# EAGLE board driver_board (EAGLE 7.5.0)
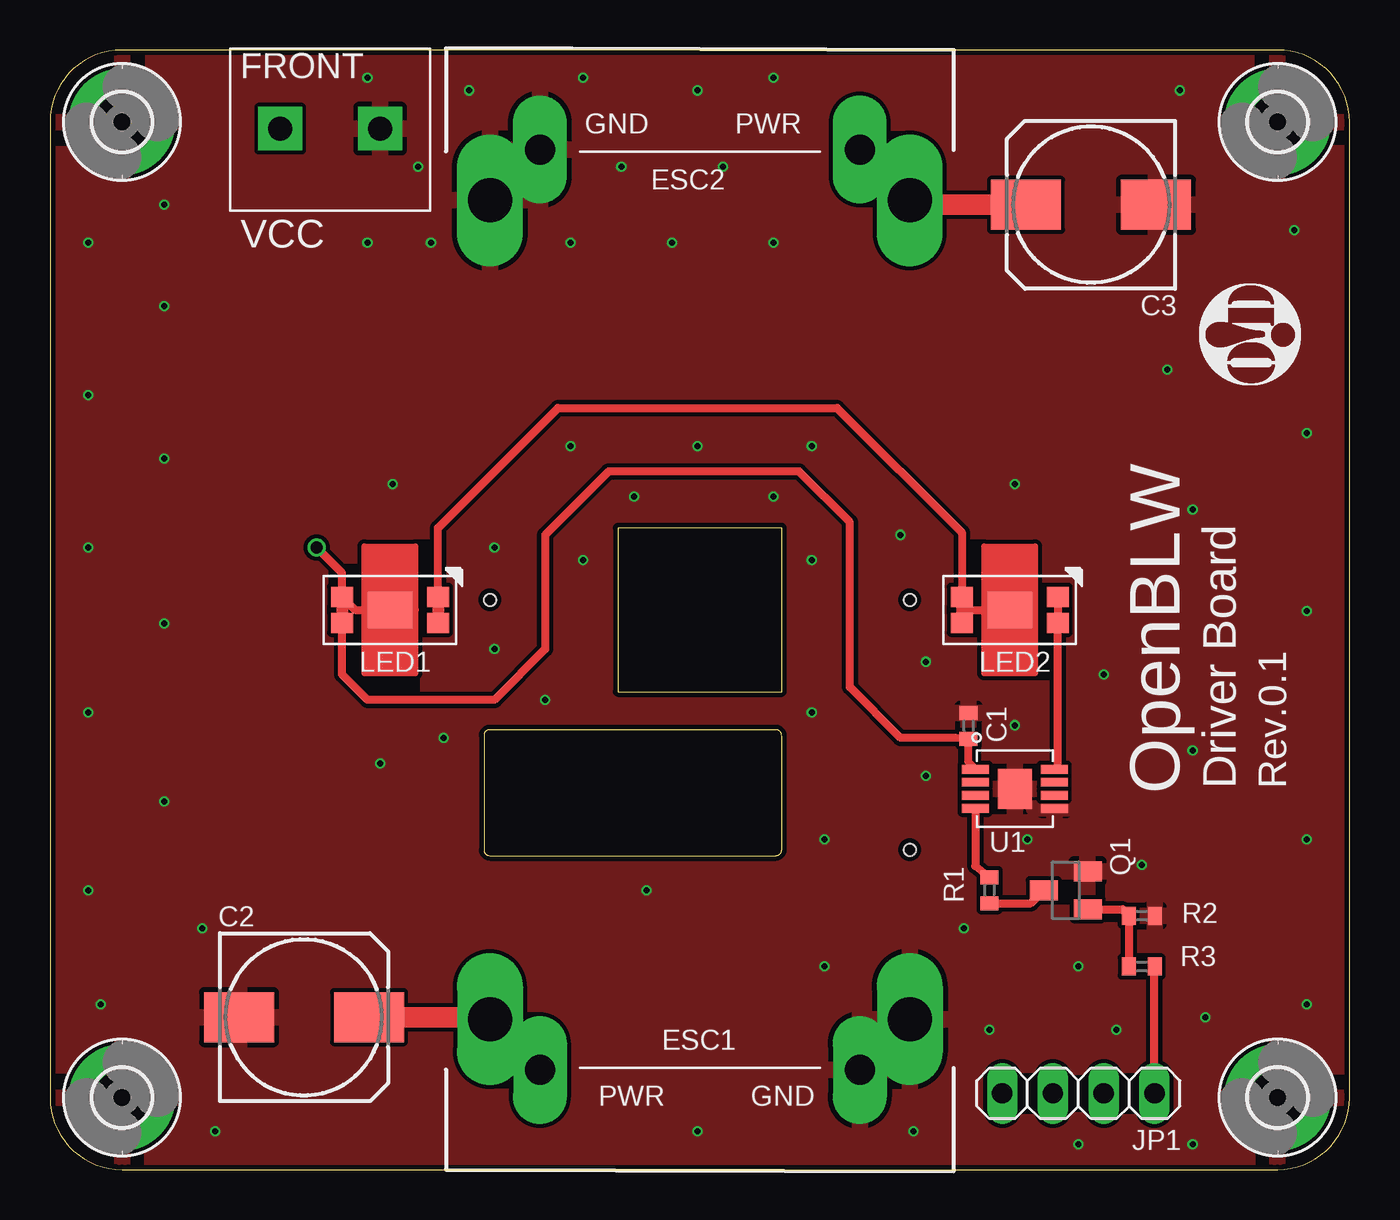
[diagram p0: board, top side]
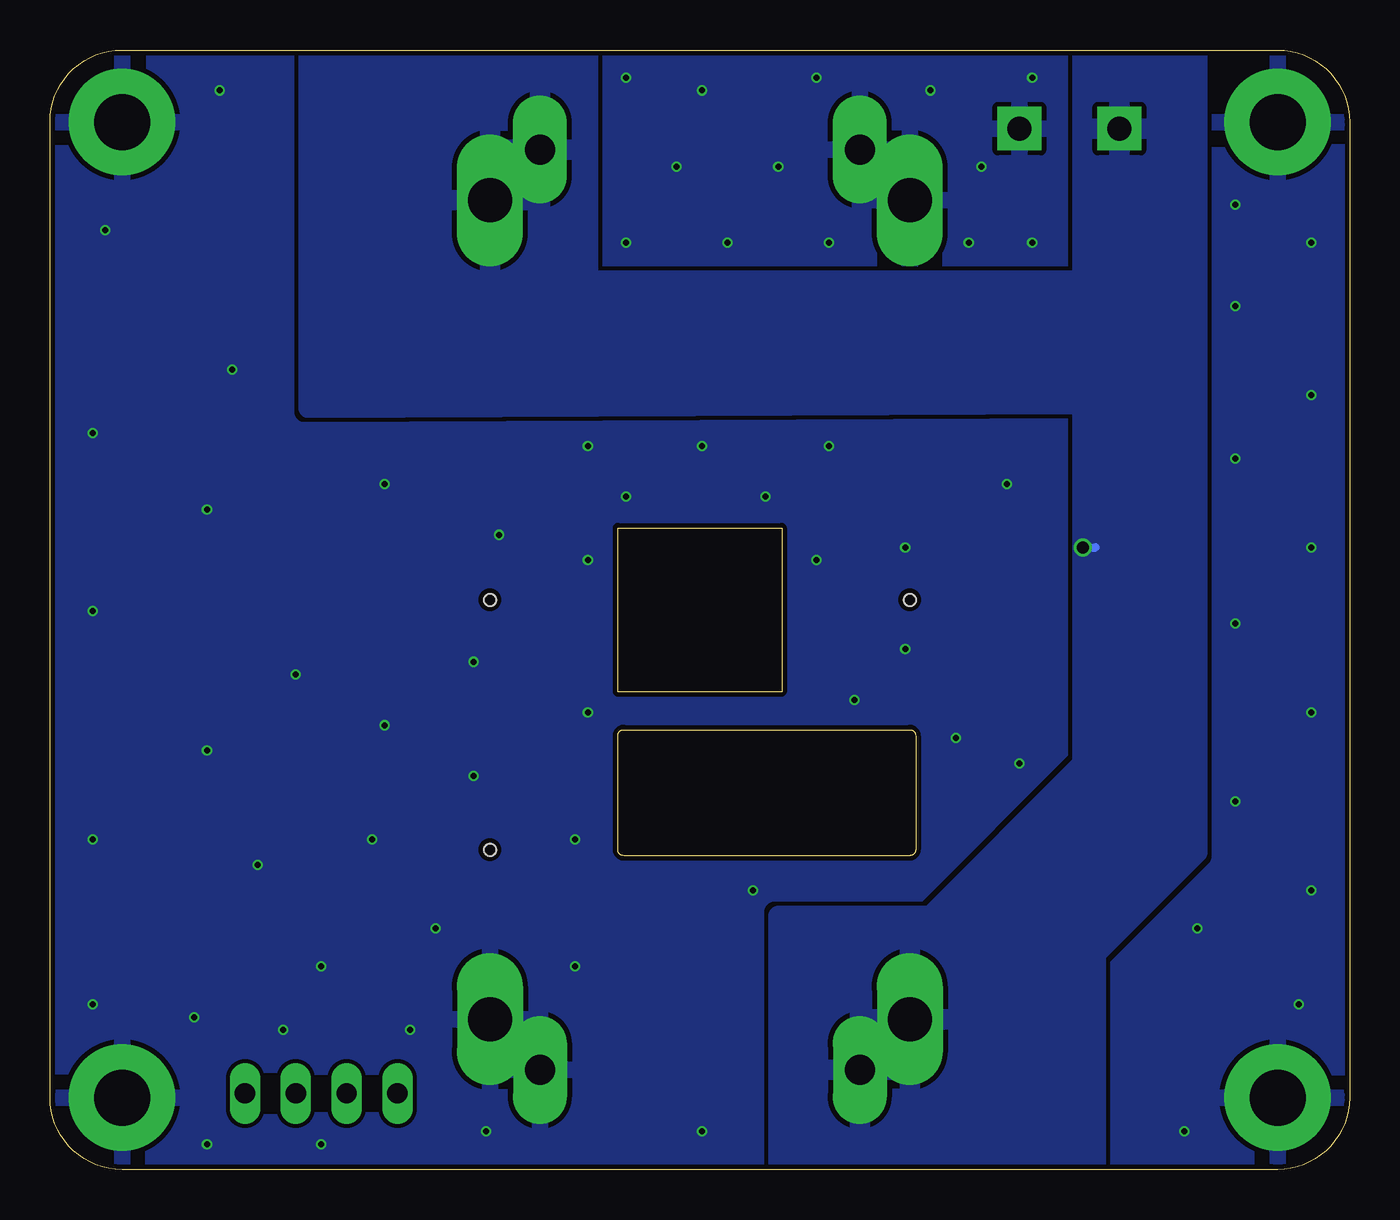
[diagram p1: board, bottom side, seen from below]

Size 65 x 56 mm. Coordinates in mm from the lower left corner, seen from the top.
Outline: 21.7,16 arc90 22,15.7 36.3,15.7 arc90 36.6,16 36.6,21.7 arc90 36.3,22 22,22 arc90 21.7,21.7 21.7,16.01
Outline: 0,3.6 arc90 3.6,0 61.4,0 arc90 65,3.6 65,52.4 arc90 61.4,56 3.6,56 arc90 0,52.4 0,3.6
Outline: 28.4,32.1 28.4,23.9 36.6,23.9 36.6,32.1 28.4,32.1
Copper layers (1*2*15*16): Top 0.035mm / dielectric 0.2mm / Route2 0.0175mm / dielectric 0.3mm / Route15 0.0175mm / dielectric 0.2mm / Bottom 0.035mm
Design rules "SeeedStudio_4layer_DRU_no_angle_20140221": minimum track width 8mil, minimum drill 12mil, track to track 8mil, track to pad 8mil, pad to pad 8mil, via to via 8mil, smd to smd 0mil, copper to edge 10mil, drill to drill 8mil, minimum pad ring 6mil, minimum via ring 4mil, stop-mask expansion 4mil, vias tented up to drill 25mil, thermal gap 10mil
Net classes: 1 GND: width 0.508 mm, drill 0.3 mm, clearance 0.2 mm to class 0, clearance 0.2 mm; 2 VCC: width 0.508 mm, drill 0.3 mm, clearance 0.2 mm to class 0, clearance 0.4 mm to class 1, clearance 0.2 mm
Holes 0.6 mm at 22,28.5 43,28.5 43,16

## Footprints (pad centres in the part's own frame; a part is rotated, then mirrored left to right if it is on the bottom)
C0402 = smd 0.7 x 0.9: 1 -0.65,0; 2 0.65,0
153CLV-0810 = smd 3.5 x 2.5: + 3.25,0; - -3.25,0
ESC_POWER = drill 2.2 pad 3.3 long: GND1 -10.5,-4.98; PWR1 10.5,-4.98 | drill 1.5 pad 2.7 long: GND2 -8,-2.44; PWR2 8,-2.44
2,8-PAD = drill 2.8 pad 5.334: B2,8 0,0
1X04 = drill 1.016 long: 1 -3.81,0; 2 -1.27,0; 3 1.27,0; 4 3.81,0
LITEON-5630 = smd 1.1 x 1: A1 2.4,-0.65; A2 2.4,0.65; C1 -2.4,-0.65; C2 -2.4,0.65 | smd 2.2 x 1.8: A3 0,0
SOT23 = smd 1 x 1.4: 1 -0.95,-1.1; 2 0.95,-1.1; 3 0,1.1
R0402 = smd 0.7 x 0.9: 1 -0.65,0; 2 0.65,0
MSOP-8EP = smd 0.45 x 1.35: 1 -0.975,-1.975; 2 -0.325,-1.975; 3 0.325,-1.975; 4 0.975,-1.975; 5 0.975,1.975; 6 0.325,1.975; 7 -0.325,1.975; 8 -0.975,1.975 | smd 2 x 1.7: HSINK 0,0
282836-2 = drill 1.2 pad 2.184 square: CON1 -2.46,0; CON2 2.54,0

## Placement (x,y rotation side)
C1  100n  [C0402]  45.95,22.2 270 top
C2  UWT1E221MNL1GS(220u)  [153CLV-0810]  12.7,7.62 0 top
C3  UWT1E221MNL1GS(220u)  [153CLV-0810]  52.07,48.26 180 top
ESC1  ESC_POWER  [ESC_POWER]  32.5,2.54 180 top
ESC2  ESC_POWER  [ESC_POWER]  32.5,53.46 0 top
H1  MOUNT-PAD-ROUND2.8  [2,8-PAD]  3.6,3.6 0 top
H2  MOUNT-PAD-ROUND2.8  [2,8-PAD]  61.4,3.6 0 top
H3  MOUNT-PAD-ROUND2.8  [2,8-PAD]  3.6,52.4 0 top
H4  MOUNT-PAD-ROUND2.8  [2,8-PAD]  61.4,52.4 0 top
JP1  M20-9990446  [1X04]  51.44,3.81 180 top
LED1  LTW-5630AZL50  [LITEON-5630]  17,28 180 top
LED2  LTW-5630AZL50  [LITEON-5630]  48,28 180 top
LOGO1  [OHMYDIGIFAB_LOGO]  60.07,41.78 90 top
Q1  IRLML6346TRPBF  [SOT23]  50.8,13.97 90 top
R1  4.99K  [R0402]  46.99,13.97 90 top
R2  100K  [R0402]  54.61,12.7 180 top
R3  1K  [R0402]  54.61,10.16 0 top
U1  AL5812MP-13  [MSOP-8EP]  48.26,19.05 270 top
U$1  282836-2  [282836-2]  13.97,52.07 0 top

## Library data of the parts
C1-C3 R1-R3 = resistor
ESC1 ESC2 LED1 LED2 LOGO1 Q1 U1 U$1 = openblw
H1-H4 = holes
JP1 = pinhead

## Nets
GND [GND]: C1.1 C2.- C3.- ESC1.GND1 ESC1.GND2 ESC2.GND1 ESC2.GND2 H1.B2,8 H2.B2,8 H3.B2,8 H4.B2,8 Q1.2 R2.1 U1.5 U1.HSINK U$1.CON2
LIGHT_PWM: JP1.1 R3.2
N$1 [VCC]: LED1.C1 LED1.C2 LED2.A1 LED2.A2 LED2.A3
N$5: R1.2 U1.4
N$6: Q1.3 R1.1
N$7: Q1.1 R2.2 R3.1
N$9: LED2.C1 LED2.C2 U1.8
VCC [VCC]: C1.2 C2.+ C3.+ ESC1.PWR1 ESC1.PWR2 ESC2.PWR1 ESC2.PWR2 LED1.A1 LED1.A2 LED1.A3 U1.1 U$1.CON1

## Tracks (layer width: path | path; a pad name or v marks a point on that pad's centre or on a via)
GND  (via drill 0.3)
  other vias: 1.91,46.35 15.88,54.61 5.71,43.18 1.91,31.11 1.91,22.86 1.91,13.97 2.54,8.26 8.26,1.91 43.18,1.91 32.38,1.91 38.73,10.16 16.51,20.32 19.68,21.59 24.77,23.5 26.67,30.48 29.21,33.66 36.2,33.66 38.1,30.48 38.1,22.86 43.81,19.68 38.73,16.51 29.84,13.97 45.72,12.06 51.44,10.16 46.99,6.99 53.34,6.99 51.44,1.27 57.15,1.27 62.87,8.26 57.78,7.62 48.9,16.51 54.61,15.24 52.7,24.77 62.87,16.51 62.87,27.94 62.87,36.83 62.23,46.99 56.52,53.98 20.95,53.98 32.38,53.98 26.04,46.35 17.14,34.29 48.26,34.29 55.88,40.01 57.15,33.02 48.26,22.23 43.81,25.4 42.55,31.75 22.23,26.04 22.23,31.11 26.04,36.2 38.1,36.2 32.38,36.2 57.15,20.95 15.88,46.35 19.05,46.35 18.41,50.16 36.2,54.61 36.2,46.35 31.11,46.35 26.67,54.61 28.57,50.16 33.66,50.16 5.71,48.26 5.71,35.56 5.71,27.3 5.71,18.41 7.62,12.06 1.91,38.73
  pour Top (rank 6): 0,55.88 0,0 65,0 65,56
  pour Bottom (rank 6): 0,55.88 0,0 65,0 65,56
LIGHT_PWM
  Top 0.406: JP1.1 55.24,10.14 R3.2
N$1
  Top 0.406: LED1.C1 19.4,32.1 25.4,38.1 39.37,38.1 45.6,31.87 LED2.A1 | LED2.A2 45.79,28 LED2.A3
  Top 0.61: LED1.C1 LED1.C2 | LED2.A1 LED2.A2
N$5
  Top 0.406: U1.4 46.28,15.19 R1.2
N$6
  Top 0.406: R1.1 49.05,13.32 Q1.3
N$7
  Top 0.406: Q1.1 53.64,13.02 R2.2 R3.1
N$9
  Top 0.406: LED2.C1 LED2.C2 50.4,20.19 U1.8
VCC  (via drill 0.6)
  Top 0.406: 18.25,28 LED1.A3 15.25,28 LED1.A1 | U1.1 45.95,20.36 C1.2 45.27,21.59 42.55,21.59 40.01,24.13 40.01,32.38 37.47,34.92 27.94,34.92 24.77,31.75 24.77,26.04 22.23,23.5 15.88,23.5 14.6,24.77 LED1.A2 | LED1.A1 14.61,29.84 v13.34,31.11 | LED1.A1 14.61,28.57
  Top 0.61: LED1.A1 LED1.A2
  Top 1.016: C2.+ 21.15,7.62 ESC1.PWR1 23.79,4.94 ESC1.PWR2 | C3.+ 43.62,48.26 ESC2.PWR1 40.98,50.94 ESC2.PWR2
  Bottom 0.406: v13.34,31.11 12.7,31.11
  pour Bottom: 7.62,55.88 7.62,15.88 12.7,10.79 12.7,0 28.57,0 28.57,12.7 20.95,12.7 13.37,20.32 13.37,38.3 52.07,38.1 52.07,55.88 38.1,55.88 38.1,44.45 13.37,44.45 13.37,55.88

## Text on the board
tPlace: VCC | OpenBLW | Driver Board | Rev.0.1